# EAGLE board Band (EAGLE 9.6.2)
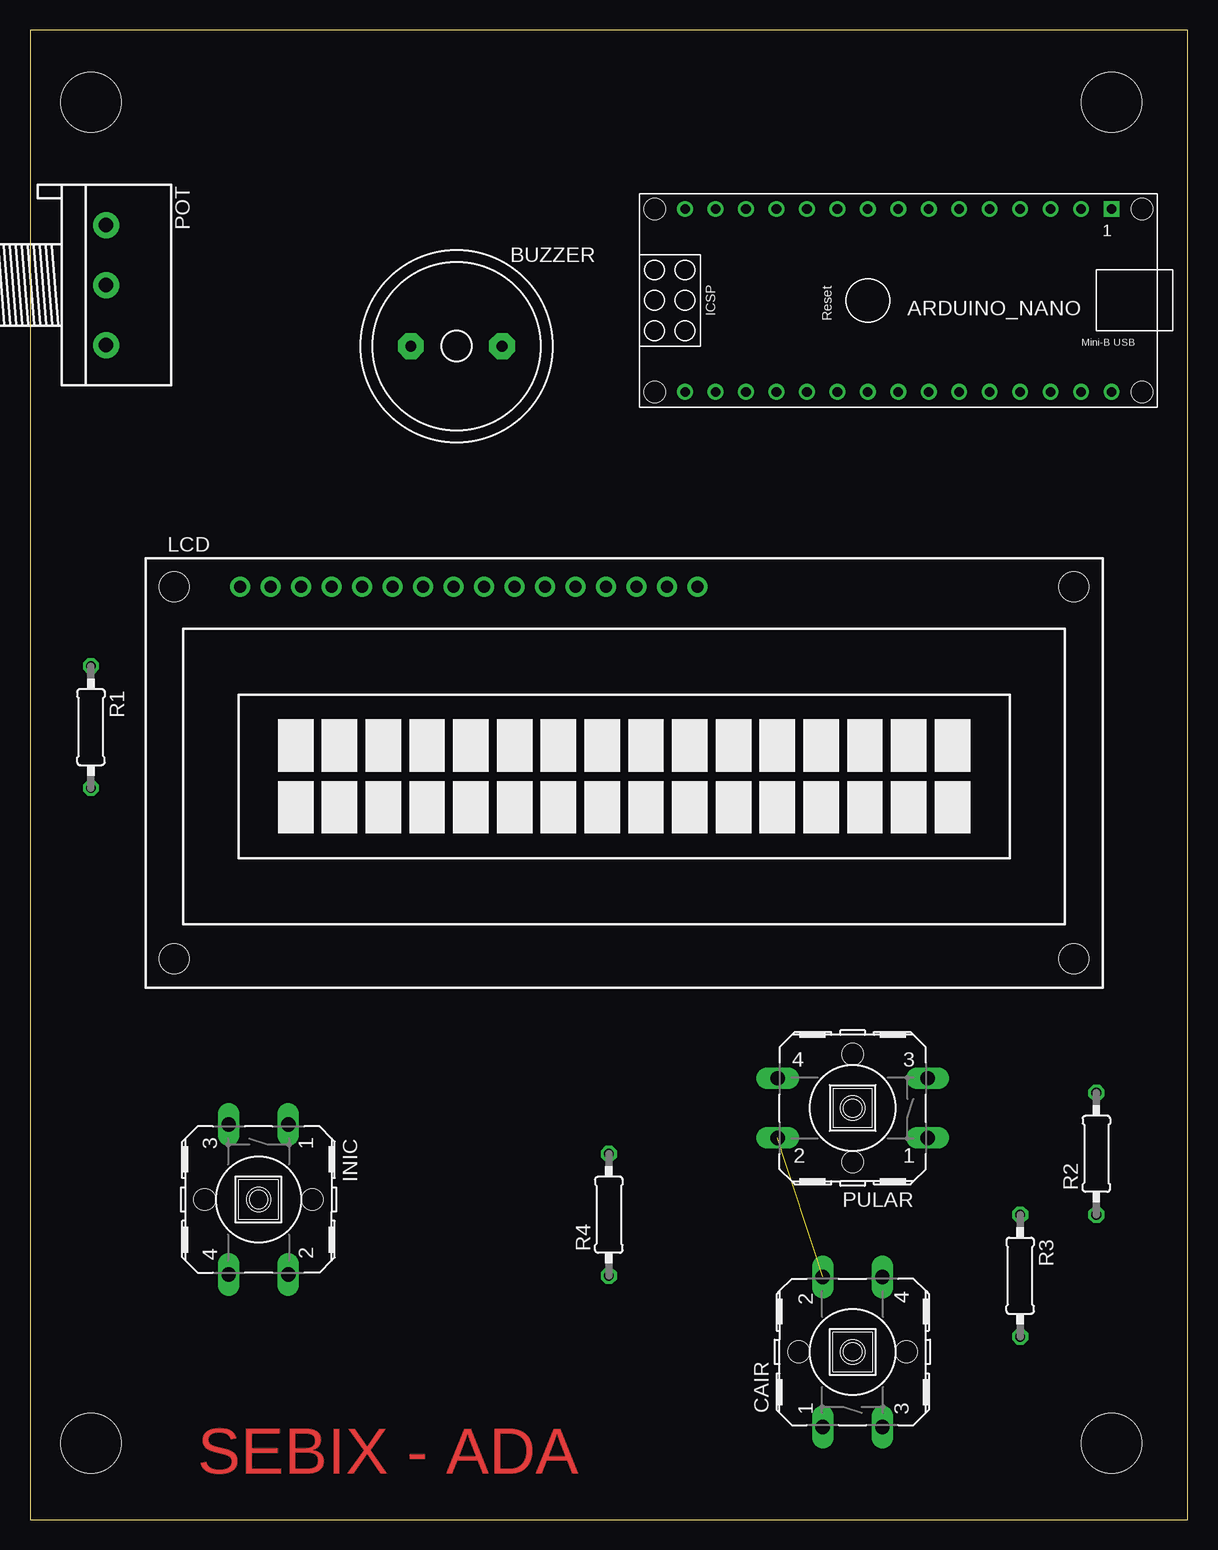
[diagram p0: board, top side]
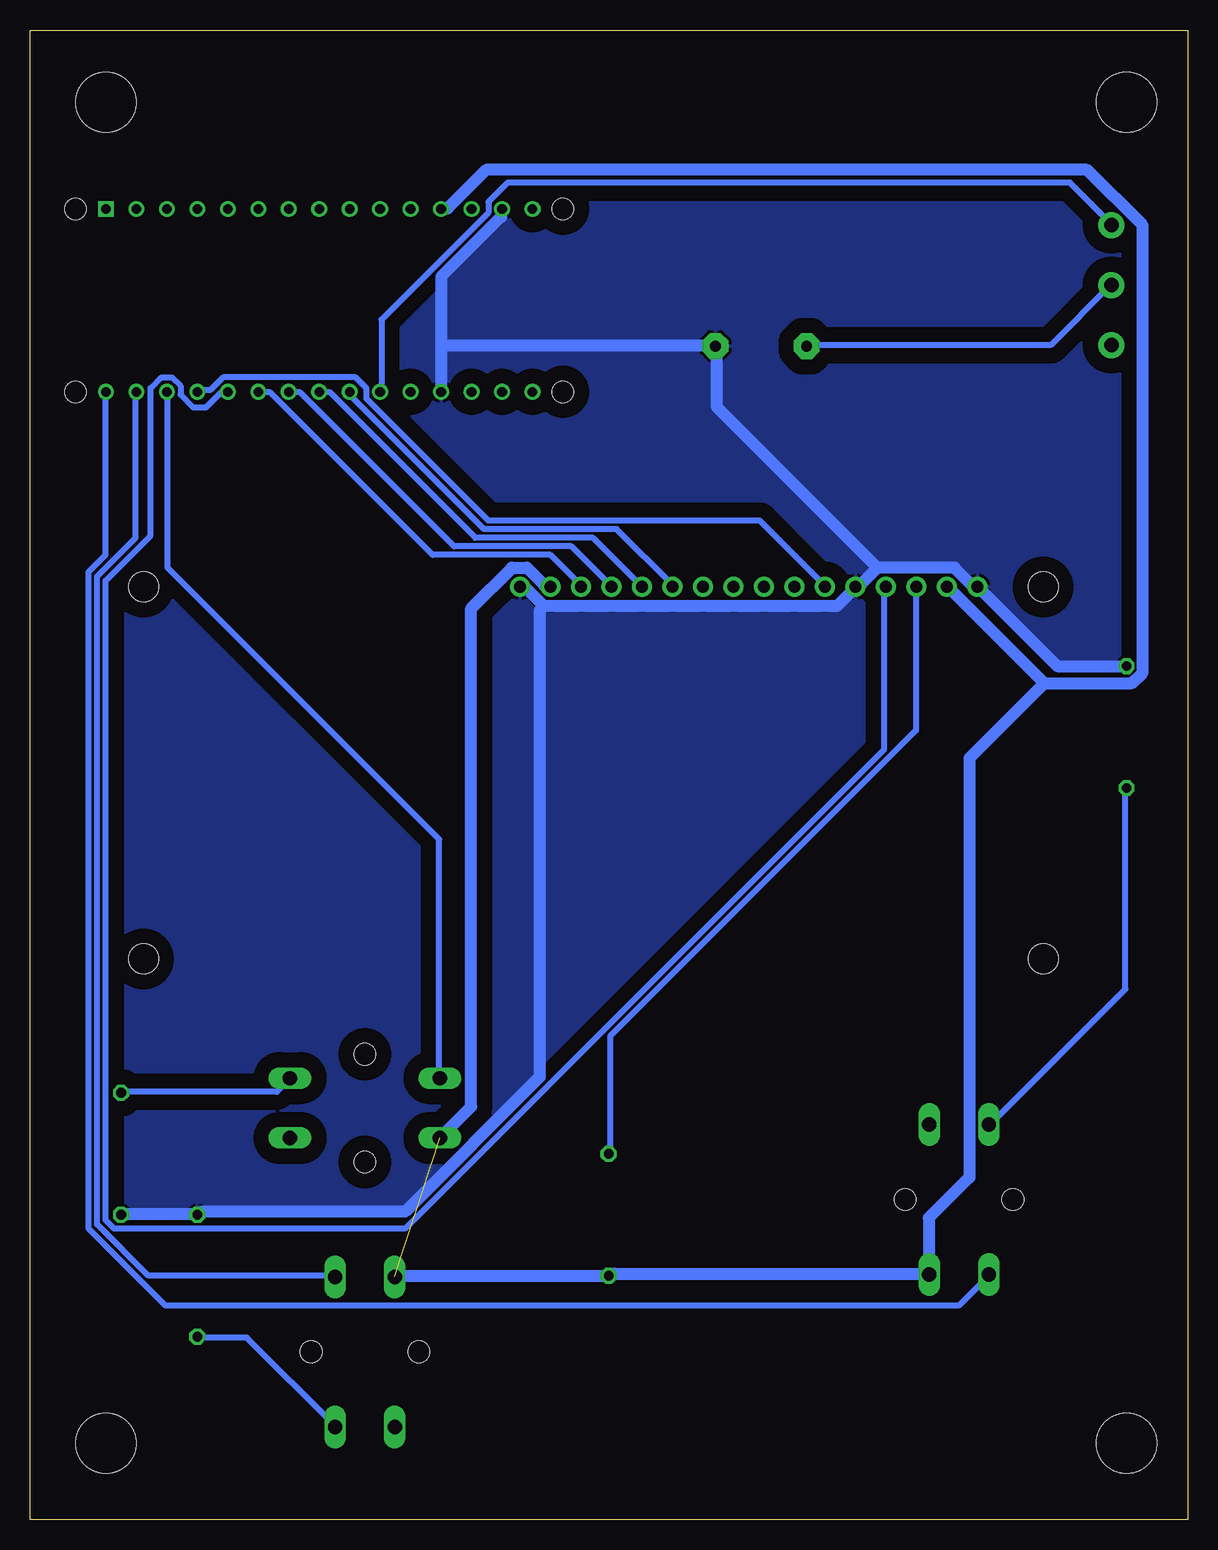
[diagram p1: board, bottom side, seen from below]

Size 96.5 x 124.13 mm. Coordinates in mm from the lower left corner, seen from the top.
Outline: 0,0 96.5,0 96.5,124.13 0,124.13 0,0
Copper layers (1*16): Top 0.035mm / dielectric 1.5mm / Bottom 0.035mm
Design rules "default": minimum track width 6mil, minimum drill 0.35mm, track to track 6mil, track to pad 6mil, pad to pad 6mil, via to via 6mil, smd to smd 6mil, copper to edge 40mil, drill to drill 6mil, minimum pad ring 10mil, minimum via ring 8mil, stop-mask expansion 4mil, vias tented up to drill 0mil, thermal gap 10mil
Net classes: 0 default: width 0.508 mm, clearance 0.205 mm; 1 Corrente: width 1.016 mm
Holes 5 mm at 5.08,6.35 90.17,6.35 5.08,118.11 90.17,118.11

## Footprints (pad centres in the part's own frame; a part is rotated, then mirrored left to right if it is on the bottom)
ARDUINO_NANO = drill 0.8 square: 1 -20.32,-7.62 | drill 0.8: 2 -17.78,-7.62; 3 -15.24,-7.62; 4 -12.7,-7.62; 5 -10.16,-7.62; 6 -7.62,-7.62; 7 -5.08,-7.62; 8 -2.54,-7.62; 9 0,-7.62; 10 2.54,-7.62; 11 5.08,-7.62; 12 7.62,-7.62; 13 10.16,-7.62; 14 12.7,-7.62; 15 15.24,-7.62; 16 15.24,7.62; 17 12.7,7.62; 18 10.16,7.62; 19 7.62,7.62; 20 5.08,7.62; 21 2.54,7.62; 22 0,7.62; 23 -2.54,7.62; 24 -5.08,7.62; 25 -7.62,7.62; 26 -10.16,7.62; 27 -12.7,7.62; 28 -15.24,7.62; 29 -17.78,7.62; 30 -20.32,7.62 | hole 1.778: -22.86,-7.62; -22.86,7.62; 17.78,7.62; 17.78,-7.62
F/QMB = drill 0.914 pad 2.159 octagon: + 3.81,0; - -3.81,0
B3F-40XX = drill 1.194 long: 1 -6.248,2.489; 2 6.248,2.489; 3 -6.248,-2.489; 4 6.248,-2.489 | hole 1.803: 0,-4.496; 0,4.496
TUXGR_16X2_R2 = drill 1 pad 1.676: 1 -32,15.5; 2 -29.46,15.5; 3 -26.92,15.5; 4 -24.38,15.5; 5 -21.84,15.5; 6 -19.3,15.5; 7 -16.76,15.5; 8 -14.22,15.5; 9 -11.68,15.5; 10 -9.14,15.5; 11 -6.6,15.5; 12 -4.06,15.5; 13 -1.52,15.5; 14 1.02,15.5; 15 3.56,15.5; 16 6.1,15.5 | hole 2.5: -37.5,-15.5; 37.5,-15.5; -37.5,15.5; 37.5,15.5
3RP/1610N = drill 1.2 pad 2.184: 1 -5,0; 2 0,0; 3 5,0
0207/10 = drill 0.813 octagon: 1 -5.08,0; 2 5.08,0

## Placement (x,y rotation side)
ARDUINO_NANO  [ARDUINO_NANO]  69.85,101.6 180 top
BUZZER  F/QMB  [F/QMB]  35.56,97.79 0 top
CAIR  [B3F-40XX]  68.58,13.97 90 top
INIC  [B3F-40XX]  19.05,26.67 270 top
LCD  TUXGR_16X2_R2  [TUXGR_16X2_R2]  49.53,62.23 0 top
POT  [3RP/1610N]  6.35,102.87 270 top
PULAR  [B3F-40XX]  68.58,34.29 180 top
R1  [0207/10]  5.08,66.04 270 top
R2  [0207/10]  88.9,30.48 90 top
R3  [0207/10]  82.55,20.32 270 top
R4  [0207/10]  48.26,25.4 90 top

## Library data of the parts
ARDUINO_NANO = ArduinoNanoV30
BUZZER = buzzer; OC_FARNELL: unknown; OC_NEWARK: unknown
CAIR INIC PULAR = switch-omron; MF: OMRON COMPONENTS USA; MPN: B3F-4000; OC_FARNELL: 176434; OC_NEWARK: 36K3105
LCD = display-lcd; OC_FARNELL: unknown; OC_NEWARK: unknown
POT = pot
R1-R4 = resistor

## Nets
GND [Corrente]: ARDUINO_NANO.14 ARDUINO_NANO.19 BUZZER.+ LCD.1 LCD.5 LCD.16 R1.1 R2.1 R3.1
N$1: ARDUINO_NANO.25 LCD.14
N$2: ARDUINO_NANO.30 INIC.4
N$3: ARDUINO_NANO.29 CAIR.4
N$4: ARDUINO_NANO.28 PULAR.4
N$5: PULAR.3 R2.2
N$6: INIC.3 R1.2
N$7: CAIR.3 R3.2
N$8: ARDUINO_NANO.24 LCD.13
N$9: ARDUINO_NANO.23 LCD.12
N$10: ARDUINO_NANO.22 LCD.11
N$11: ARDUINO_NANO.26 LCD.4
N$12: ARDUINO_NANO.27 LCD.6
N$13: LCD.3 R4.2
N$14: ARDUINO_NANO.21 POT.1
N$15: BUZZER.- POT.2
VCC [Corrente]: ARDUINO_NANO.12 CAIR.2 INIC.2 LCD.2 LCD.15 PULAR.2 R4.1
VIN [Corrente]: ARDUINO_NANO.15

## Tracks (layer width: path | path; a pad name or v marks a point on that pad's centre or on a via)
GND
  Bottom 1.016: 62.21,97.86 62.21,103.56 57.22,108.55 57.22,109.09 ARDUINO_NANO.14 | 62.21,97.86 62.21,94.12 ARDUINO_NANO.19 | 62.21,97.86 39.39,97.86 BUZZER.+ 39.22,97.33 39.22,92.69 25.85,79.32 | R2.1 88.77,25.49 82.71,25.49 R3.1 82.17,25.67 65.24,25.67 54.01,36.9 54.01,75.76 53.65,76.11 | R1.1 5.17,71.12 10.87,71.12 17.47,77.72 LCD.1 18,77.89 19.43,79.32 25.85,79.32 | 25.85,79.32 27.27,77.89 27.63,77.89 LCD.5 27.98,77.36 29.23,76.11 53.65,76.11 | 53.65,76.11 55.26,77.72 55.61,77.72 LCD.16
  pour Bottom (isolate 1.27): 1.27,1.27 90.17,1.27 95.25,6.35 95.25,118.11 90.17,123.19 5.08,123.19 1.27,119.38
N$1
  Bottom 0.508: ARDUINO_NANO.25 77.36,93.94 76.47,93.94 62.92,80.39 53.12,80.39 50.62,77.89 LCD.14
N$2
  Bottom 0.508: ARDUINO_NANO.30 90.19,93.94 90.19,80.39 91.62,78.97 91.62,24.24 85.2,17.82 19.07,17.82 16.58,20.32 INIC.4
N$3
  Bottom 0.508: ARDUINO_NANO.29 87.7,93.94 87.7,81.82 90.91,78.61 90.91,24.6 86.63,20.32 71.12,20.32 CAIR.4
N$4
  Bottom 0.508: ARDUINO_NANO.28 85.03,93.94 85.03,79.32 62.39,56.68 62.39,36.9 PULAR.4
N$5
  Bottom 0.508: R2.2 88.77,35.65 75.93,35.65 74.86,36.72 PULAR.3
N$6
  Bottom 0.508: R1.2 5.17,60.78 5.17,44.21 16.4,32.98 INIC.3
N$7
  Bottom 0.508: R3.2 82.53,15.15 78.43,15.15 71.12,7.84 CAIR.3
N$8
  Bottom 0.508: ARDUINO_NANO.24 74.86,93.94 73.97,93.94 61.14,81.1 51.34,81.1 48.13,77.89 LCD.13
N$9
  Bottom 0.508: ARDUINO_NANO.23 72.37,93.94 71.48,93.94 59.36,81.82 49.55,81.82 45.63,77.89 LCD.12
N$10
  Bottom 0.508: ARDUINO_NANO.22 69.7,93.94 69.7,93.58 58.64,82.53 47.59,82.53 42.96,77.89 LCD.11
N$11
  Bottom 0.508: ARDUINO_NANO.26 80.03,93.94 80.57,93.94 81.82,92.69 82.89,92.69 83.96,93.76 83.96,94.47 84.67,95.19 85.56,95.19 86.45,94.29 86.45,82 90.19,78.25 90.19,24.95 89.48,24.24 65.24,24.24 25.31,64.17 25.31,77.72 LCD.4
N$12
  Bottom 0.508: ARDUINO_NANO.27 82.53,94.12 81.46,94.12 80.39,95.19 69.34,95.19 68.45,94.29 68.45,93.4 58.29,83.24 35.65,83.24 30.3,77.89 LCD.6
N$13
  Bottom 0.508: R4.2 48.13,30.48 48.13,40.28 22.64,65.77 22.64,77.72 LCD.3
N$14
  Bottom 0.508: ARDUINO_NANO.21 67.2,94.12 67.2,100 58.29,108.91 58.29,109.8 56.68,111.41 9.8,111.41 6.42,108.02 POT.1
N$15
  Bottom 0.508: BUZZER.- 31.73,97.86 11.41,97.86 6.42,102.85 POT.2
VCC  (1 unrouted)
  Bottom 1.016: CAIR.2 65.95,20.32 48.31,20.32 R4.1 47.77,20.5 21.57,20.5 INIC.2 21.57,21.03 21.57,25.13 18.18,28.52 18.18,63.46 11.94,69.7 | 11.94,69.7 4.63,69.7 3.74,70.59 3.74,107.84 8.38,112.48 58.47,112.48 61.67,109.27 62.21,109.27 ARDUINO_NANO.12 | 11.94,69.7 19.96,77.72 LCD.2 | LCD.15 53.12,77.89 53.65,77.89 55.08,79.32 56.33,79.32 59.71,75.93 59.71,34.4 62.21,31.91 PULAR.2

## Text on the board
Top: SEBIX - ADA